# Altium PCB PCB.PcbDoc
Units mm, origin at the board's own origin, x right, y up, seen from the top; angles counter-clockwise.
Board outline 40 x 30 mm, 2 copper layers (Top Layer, Bottom Layer); 29 components, 28 nets, 145 pads, 106 vias.
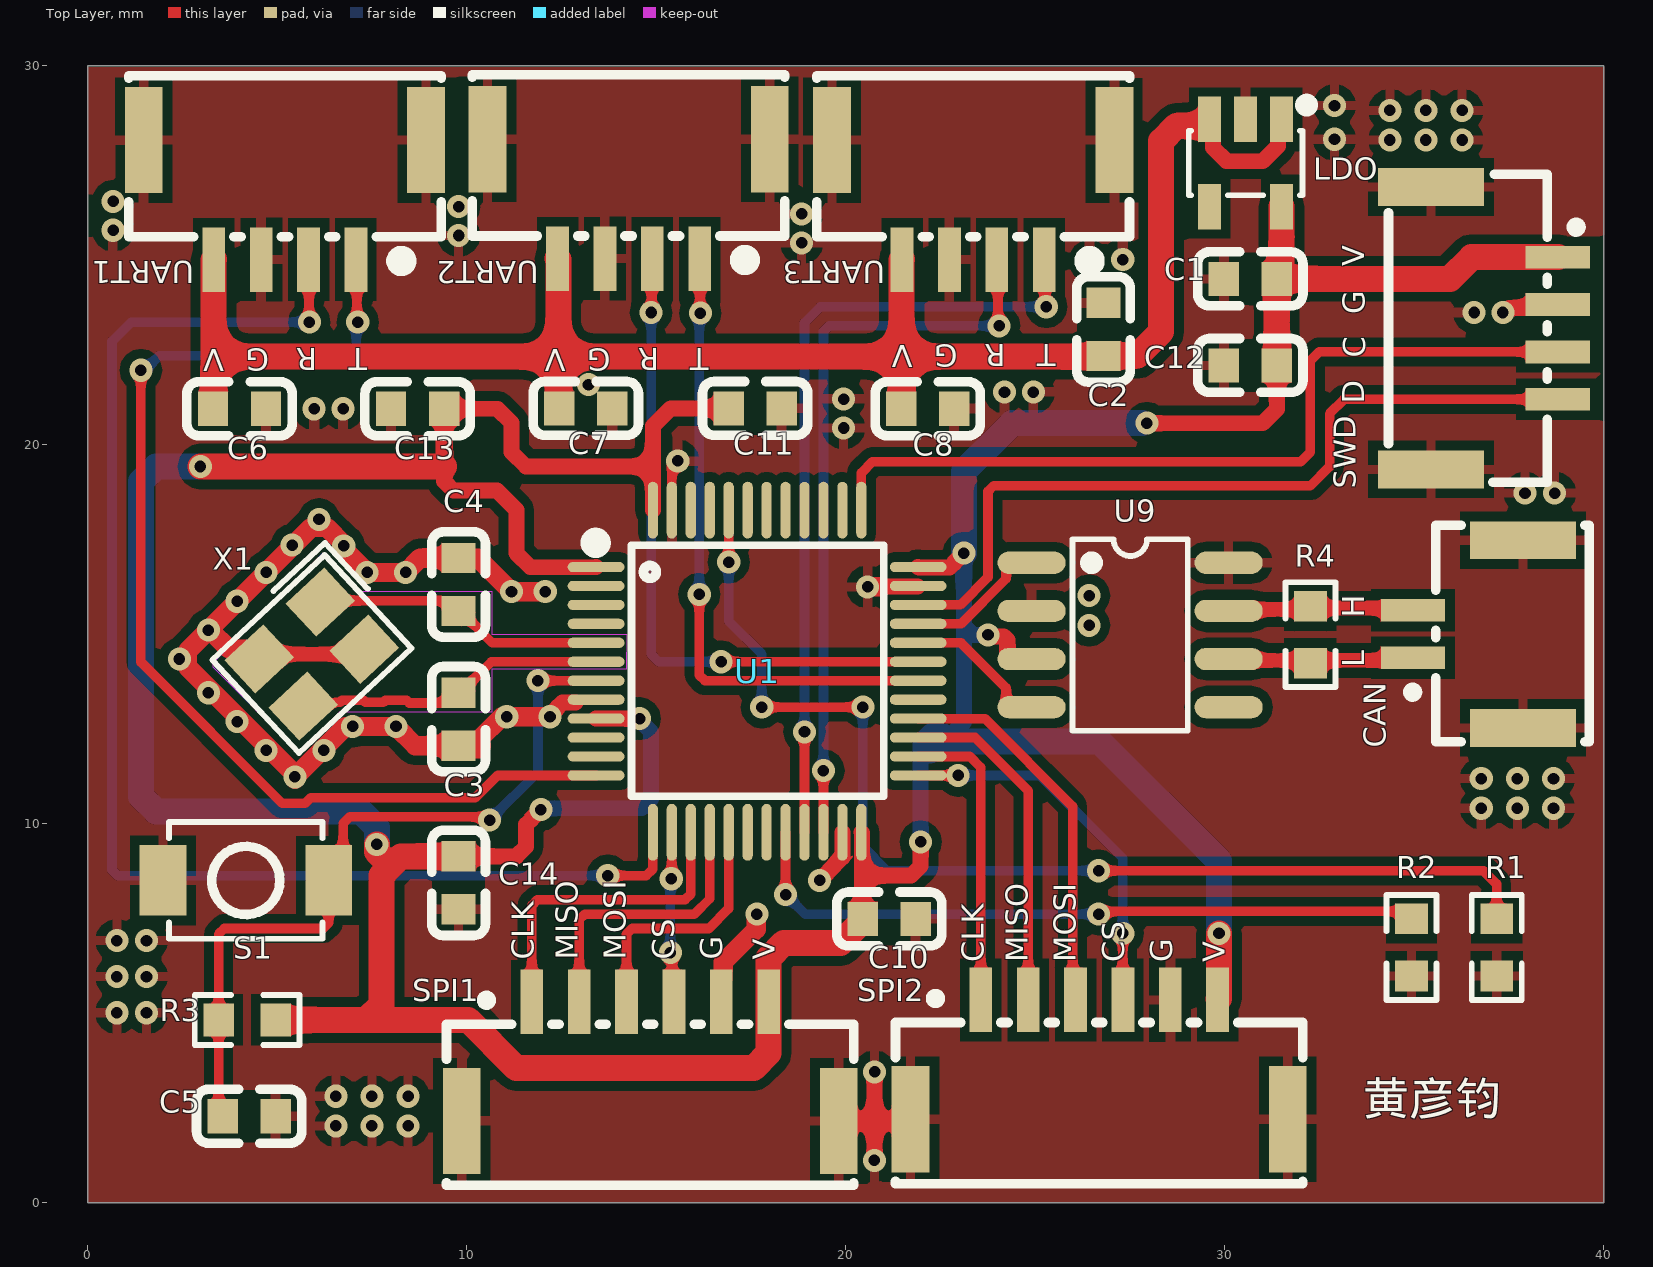
[diagram p0: Top Layer view]
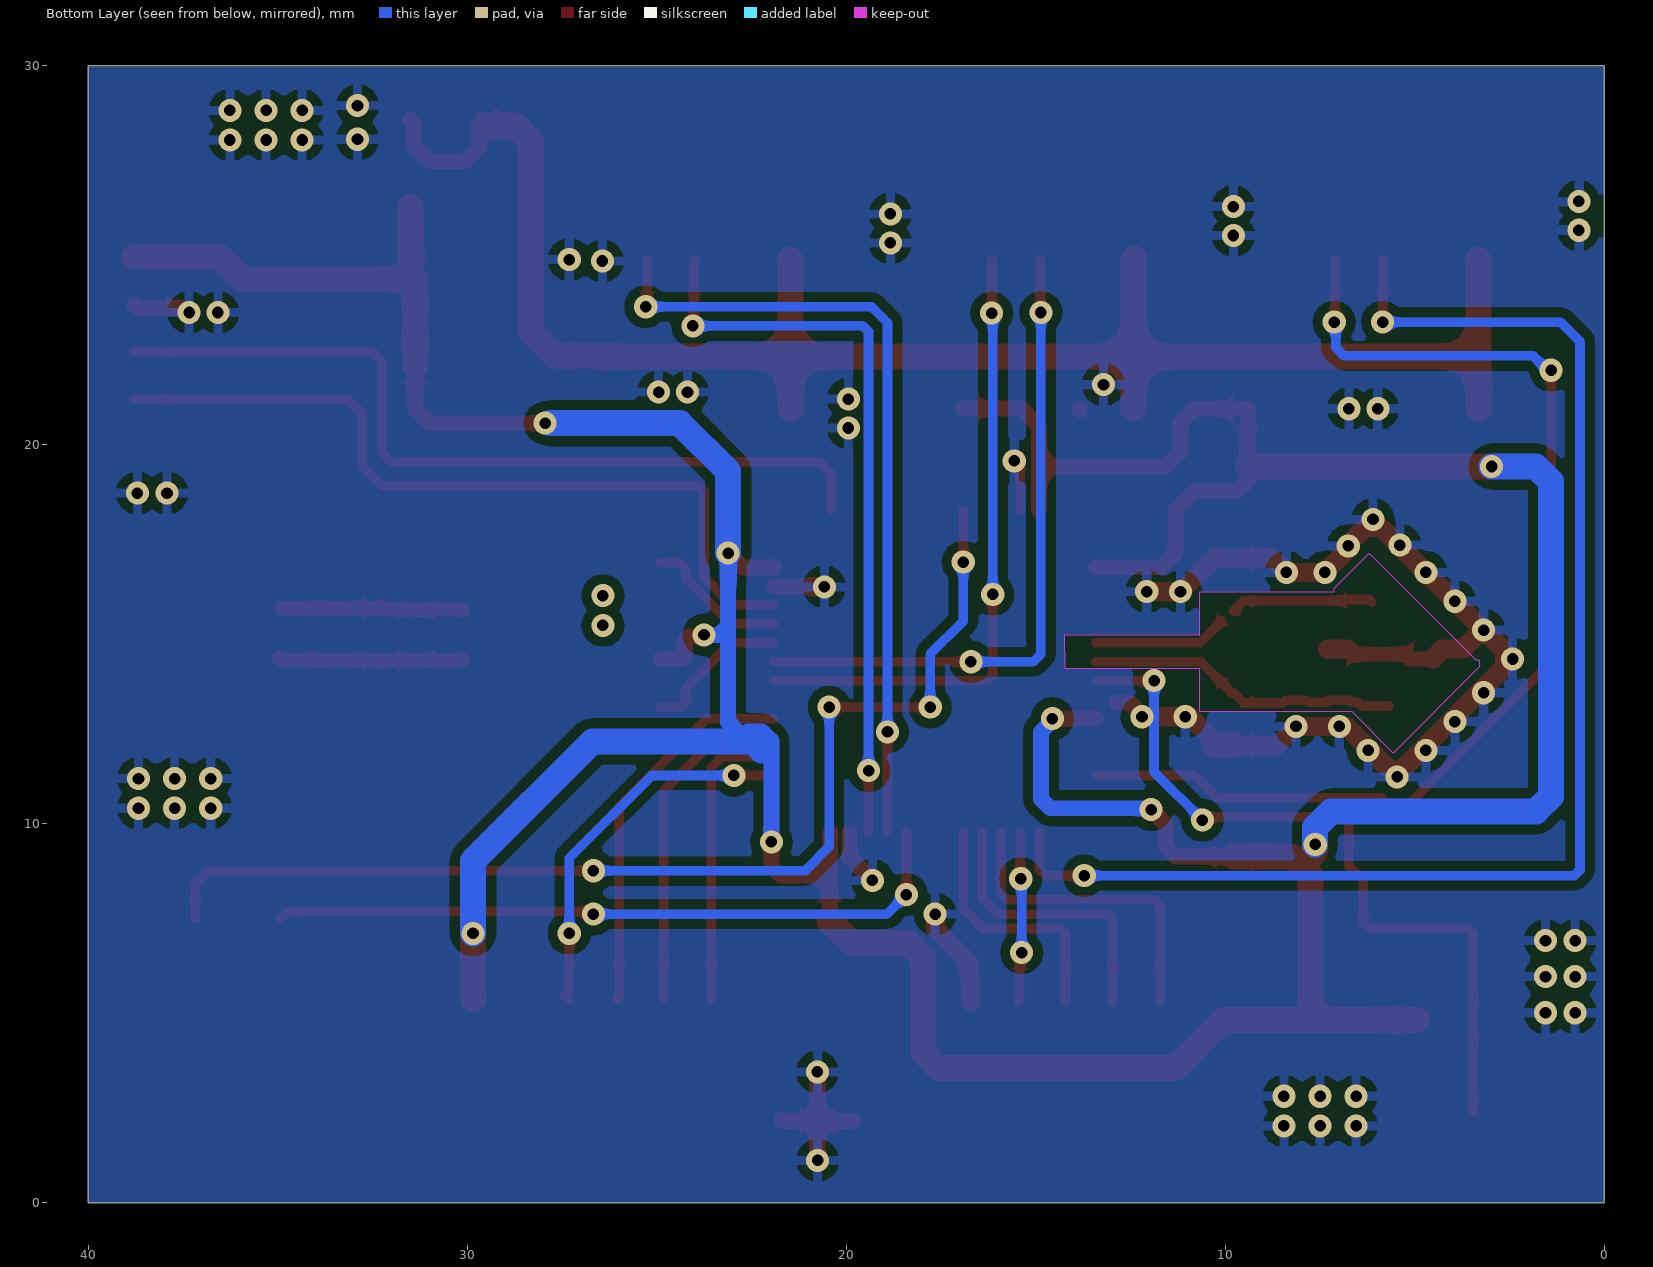
[diagram p1: Bottom Layer view, seen from below]

## Layer stack, top to bottom
Top Solder: solder mask 0.0102, Solder Resist, Dk 3.5
Top Layer: signal copper 0.0356
Dielectric 1: dielectric 0.32, FR-4, Dk 4.8
Bottom Layer: signal copper 0.0356
Bottom Solder: solder mask 0.0102, Solder Resist, Dk 3.5

## Board outline
0,0 40,0 40,30 0,30

## Design rules (kind name [scope] priority, off if disabled: settings)
Clearance [All] p1 off: gap=0.254 ignorepadtopadclearanceinfootprint=TRUE except(0: Arc-Hole Track-Hole SMDPad-Hole THPad-Hole Via-Hole Fill-Hole Poly-Hole Region-Hole Text-Hole)
DiffPairsRouting [All] p1 off: maxlimit=0.254 minlimit=0.254 mostfreqgap=0.254 toplayer_minwidth=0.381 toplayer_maxwidth=0.381 toplayer_prefwidth=0.381 bottomlayer_minwidth=0.381 bottomlayer_maxwidth=0.381 bottomlayer_prefwidth=0.381 maxuncoupledlength=12.7
FanoutControl Fanout_BGA [IsBGA] p1 off: bgadir=Out bgaviamode=Centered fanoutstyle=Auto fanoutdirection=Alternating viagrid=0.025 // Fanout_BGA (Default Rule)
FanoutControl Fanout_LCC [IsLCC] p2 off: bgadir=Out bgaviamode=Centered fanoutstyle=Auto fanoutdirection=Alternating viagrid=0.025 // Fanout_LCC (Default Rule)
FanoutControl Fanout_SOIC [IsSOIC] p3 off: bgadir=Out bgaviamode=Centered fanoutstyle=Auto fanoutdirection=Alternating viagrid=0.025 // Fanout_SOIC (Default Rule)
FanoutControl Fanout_Small [(CompPinCount < 5)] p4 off: bgadir=Out bgaviamode=Centered fanoutstyle=Auto fanoutdirection=OutThenIn viagrid=0.025 // Fanout_Small (Default Rule)
FanoutControl Fanout_Default [All] p5 off: bgadir=Out bgaviamode=Centered fanoutstyle=Auto fanoutdirection=Alternating viagrid=0.025 // Fanout_Default (Default Rule)
PolygonConnect [All] p1: connectstyle=Relief reliefconductorwidth=0.254 reliefentries=4 polygonreliefangle="90 Angle" airgapwidth=0.254
RoutingCorners [All] p1 off: cornerstyle=45-Degree minsetback=2.54 maxsetback=2.54
RoutingLayers [All] p1 off: top layer_v5=TRUE bottom layer_v5=TRUE
RoutingPriority [All] p1 off: routingpriority=0
RoutingTopology [All] p1 off: topology=Shortest
RoutingVias [All] p1 off: holewidth=0.711 width=1.27 viastyle="Through Hole" minholewidth=0.711 minwidth=1.27 maxholewidth=0.711 maxwidth=1.27
ShortCircuit [All] p1 off: allowed=FALSE
SolderMaskExpansion [All] p1: expansion=0.102 istentingtop=FALSE
UnRoutedNet [All] p1 off:
UnpouredPolygon [All] p1 off:
Width [All] p1 off: maxlimit=0.254 minlimit=0.254 preferedwidth=0.254
17 further rules are at their usual default settings.

## Classes and differential pairs
component class Schematic: C1 C2 C3 C5 C6 C7 C8 C10 C11 C12 C13 C14 CAN LDO R1 R2 R3 R4 S1 SWD U9 UART1 UART2 UART3 X1
differential pair NewDifferentialPair4: +RCC_OSC_IN -RCC_OSC_OUT
differential pair NewDifferentialPair3: +CAN_TX -CAN_RX
differential pair NewDifferentialPair2: +CAN_RX -CAN_TX
differential pair NewDifferentialPair1: +CAN_H -CAN_L

## Components (designator, comment, footprint, x,y, rotation, side; value= is the part's Value field where it differs from the comment)
C1 "" CAP_0603 38.934,25.96 r0 top value=1uF
C2 "" CAP_0603 28.373,14.787 r270 top value=1uF
C3 "" CAP_0603 8.203,21.027 r90 top value=20pF
C4 "" CAP_0603 8.203,24.58 r90 top value=20pF
C5 "" CAP_0603 12.515,3.862 r0 top value=100nF
C6 "" CAP_0603 -4.263,19.379 r180 top value=100nF
C7 "" CAP_0603 4.873,19.389 r180 top value=100nF
C8 "" CAP_0603 13.898,19.379 r180 top value=100nF
C10 "" CAP_0603 12.882,5.917 r180 top value=100nF
C11 "" CAP_0603 9.344,19.389 r180 top value=100nF
C12 "" CAP_0603 38.934,23.674 r0 top value=100nF
C13 "" CAP_0603 16.96,22.531 r0 top value=100nF
C14 "" CAP_0603 8.203,16.706 r90 top value=100nF
CAN "WAFER-GH1.25-2PWB" WAFER-GH1.25-2PWB 36.849,15.708 r90 top (schematic designator U10)
LDO "spx3819-3.3" spx3819-3.3 28.834,30.367 r90 top (schematic designator U2)
R1 "" RES_0603 35.675,8.657 r90 top value=10K
R2 "" RES_0603 36.423,4.823 r270 top value=10K
R3 "" RES_0603 6.117,6.324 r0 top value=10K
R4 "" RES_0603 33.756,13.078 r270 top value=120
S1 "SW-PB" SW -0.274,8.78 r180 top
SPI1 "WAFER-GH1.25-6PWB" WAFER-GH1.25-6PWB 14.442,3.002 r0 top (schematic designator U7)
SPI2 "WAFER-GH1.25-6PWB" WAFER-GH1.25-6PWB 26.289,3.048 r0 top (schematic designator U8)
SWD "WAFER-GH1.25-4PLB" WAFER-GH1.25-4PLB 36.449,23.114 r270 top (schematic designator U6)
U1 "STM32F103C8T6" STM32F103C8T6 19.134,5.44 r270 top
U9 "SN65HVD230DR" SN65HVD230DR 29.664,11.289 r270 top
UART1 "WAFER-GH1.25-4PWB" WAFER-GH1.25-4PWB 11.327,25.675 r180 top (schematic designator U3)
UART2 "WAFER-GH1.25-4PWB" WAFER-GH1.25-4PWB 20.396,25.7 r180 top (schematic designator U4)
UART3 "WAFER-GH1.25-4PWB" WAFER-GH1.25-4PWB 29.488,25.675 r180 top (schematic designator U5)
X1 "X32258MSB4SI" X32258MSB4SI 4.545,12.174 r223 top

## Footprints (in the part's own frame and the unit in brackets; to place one, negate y for a bottom-side part, rotate by r counter-clockwise, add the part's x,y. Pads: shape width x height; smd on the part's side, far side on the other; paste and mask are expansions set on the pad)
CAP_0603 [mm]
  rect 0.8x0.9 smd: 1(-8.962,-1.576) 2(-7.562,-1.576)
  silkscreen extent -9.65,-2.29 -6.87,-0.87, body extent -9.4,-2.16 -7.11,-1.02, height 0.25
RES_0603 [mm]
  rect 0.806x0.864 smd paste-100 mask+0.051: 1(-2.67,-1.498) 2(-1.164,-1.498)
  silkscreen extent -3.3,-2.16 -0.53,-0.84, body extent -3.17,-2.16 -0.63,-0.89, height 0.25
SN65HVD230DR [mm]
  oval 0.588x1.8 smd paste+0 mask+0.051: 1(-5.602,-4.765) 2(-4.332,-4.765) 3(-3.062,-4.765) 4(-1.792,-4.765) 5(-1.792,0.435) 6(-3.062,0.435) 7(-4.332,0.435) 8(-5.602,0.435)
  silkscreen extent -6.22,-3.69 -1.17,-0.64, body extent -6.1,-3.68 -1.27,-0.76, height 0.25
spx3819-3.3 [mm]
  rect 1.2x0.6 smd paste+0 mask+0.05: 1(-1.778,-2.662) 2(-1.778,-1.712) 3(-1.778,-0.762) 4(-4.078,-0.762) 5(-4.078,-2.662)
  silkscreen extent -3.78,-3.47 -1.25,-0.21, body extent -3.73,-3.16 -2.13,-0.26, height 0.25
STM32F103C8T6 [mm]
  oval 0.27x1.5 smd paste+0 mask+0.05: 1(-11.339,-5.727) 2(-10.839,-5.727) 3(-10.339,-5.727) 4(-9.839,-5.727) 5(-9.339,-5.727) 6(-8.839,-5.727) 7(-8.339,-5.727) 8(-7.839,-5.727) 9(-7.339,-5.727) 10(-6.839,-5.727) 11(-6.339,-5.727) 12(-5.839,-5.727) 25(-5.839,2.773) 26(-6.339,2.773) 27(-6.839,2.773) 28(-7.339,2.773) 29(-7.839,2.773) 30(-8.339,2.773) 31(-8.839,2.773) 32(-9.339,2.773) 33(-9.839,2.773) 34(-10.339,2.773) 35(-10.839,2.773) 36(-11.339,2.773)
  oval 1.5x0.27 smd paste+0 mask+0.05: 13(-4.339,-4.227) 14(-4.339,-3.727) 15(-4.339,-3.227) 16(-4.339,-2.727) 17(-4.339,-2.227) 18(-4.339,-1.727) 19(-4.339,-1.227) 20(-4.339,-0.727) 21(-4.339,-0.227) 22(-4.339,0.273) 23(-4.339,0.773) 24(-4.339,1.273) 37(-12.839,1.273) 38(-12.839,0.773) 39(-12.839,0.273) 40(-12.839,-0.227) 41(-12.839,-0.727) 42(-12.839,-1.227) 43(-12.839,-1.727) 44(-12.839,-2.227) 45(-12.839,-2.727) 46(-12.839,-3.227) 47(-12.839,-3.727) 48(-12.839,-4.227)
  silkscreen extent -12.18,-5.94 -5.29,1.86, body extent -11.94,-4.83 -5.33,1.78, height 0.25
SW [mm]
  rect 1.23x1.86 smd: 1(-6.624,0.271) 2(-2.254,0.271)
  silkscreen extent -6.47,-1.27 -2.41,1.81, body extent -6.35,-1.14 -2.54,1.65, height 0.25
WAFER-GH1.25-2PWB [mm]
  rect 0.6x1.7 smd paste+0 mask+0.05: 1(-1.322,1.884) 2(-0.072,1.884)
  rect 1x2.8 smd paste+0 mask+0.05: 3(-3.172,-1.016) 4(1.778,-1.016)
  silkscreen extent -3.54,-2.76 2.18,2.02, body extent -3.43,-2.76 2.18,1.14, height 0.25
WAFER-GH1.25-4PLB [mm]
  rect 0.6x1.7 smd: 1(-1.841,2.337) 2(-0.591,2.337) 3(0.659,2.337) 4(1.909,2.337)
  rect 1x2.8 smd: 5(-3.691,-1.013) 6(3.759,-1.013)
  silkscreen extent -4.03,-2.13 4.1,2.95, body extent -3.94,-2.03 3.94,1.91, height 0.25
WAFER-GH1.25-4PWB [mm]
  rect 0.6x1.7 smd paste+0 mask+0.05: 1(4.255,0.783) 2(5.505,0.783) 3(6.755,0.783) 4(8.005,0.783)
  rect 1x2.8 smd paste+0 mask+0.05: 5(9.855,-2.367) 6(2.405,-2.367)
  silkscreen extent 2,-4.06 10.25,1.02, body extent 2.16,-3.94 10.17,0, height 0.25
WAFER-GH1.25-6PWB [mm]
  rect 0.6x1.7 smd paste+0 mask+0.05: 1(-2.73,2.307) 2(-1.48,2.307) 3(-0.23,2.307) 4(1.02,2.307) 5(2.27,2.307) 6(3.52,2.307)
  rect 1x2.8 smd paste+0 mask+0.05: 7(5.37,-0.843) 8(-4.58,-0.843)
  silkscreen extent -4.98,-2.54 5.77,2.47, body extent -4.83,-2.41 5.75,1.52, height 0.25
X32258MSB4SI [mm]
  rect 1.4x1.2 smd: 1(-3.669,-1.61) 2(-1.469,-1.61) 3(-1.469,0.09) 4(-3.669,0.09)
  silkscreen extent -4.83,-2.67 -0.54,0.92, body extent -4.45,-2.29 -0.63,0.76, height 0.25

## Part data
C1 C2 C3 C4 C5 C6 C7 C8 C10 C11 C12 C13 C14: library part Cap, "Capacitor", LatestRevisionDate=17-Jul-2002, LatestRevisionNote="Re-released for DXP Platform.", PackageDescription="Radial Cap, Thru-Hole; 2 Leads; 0.3 in Pin Spacing", PackageReference=RAD-0.3, Published=8-Jun-2000, Publisher="Altium Limited"
R1 R2 R3 R4: library part Res2, "Resistor", LatestRevisionDate=17-Jul-2002, LatestRevisionNote="Re-released for DXP Platform.", PackageDescription="Axial Device, Thru-Hole; 2 Leads; 0.4 in Pin Spacing", PackageReference=AXIAL-0.4, Published=8-Jun-2000, Publisher="Altium Limited"
S1: "Switch", LatestRevisionDate=17-Jul-2002, LatestRevisionNote="Re-released for DXP Platform.", PackageDescription="Switch; 2 Leads", PackageReference=SPST-2, Published=24-Mar-1999, Publisher="Altium Limited"

## Via types
v1: diameter 0.61, hole 0.305, Top Layer to Bottom Layer, 106 vias

## Nets (pads, with @x,y where several pads share a name; then routed paths per layer and width w, separated by ;. In a path a pad name is that pad's centre, name@x,y a point inside that pad or via, vN(x,y) a via of type N, cw(c..) or ccw(c..) an arc to the next point about the centre after c; other vN are vias at no path point)
3V3: C1.2 C10.2 C11.2 C12.2 C13.2 C14.2 LDO.5 R3.2 SPI1.6 SPI2.6 SWD.1 U1.1 U1.9 U1.24 U1.36 U1.48 U9.3 | length 130.5
  Top Layer w0.419: C14.2 11.303,9.144 11.557,9.398 11.557,9.981 v1(11.951,10.376) ; U1.9 v1(14.557,12.779) ; U1.1 13.4,16.772 11.676,16.772 11.303,17.145 11.303,18.288 10.795,18.796 9.644,18.796 9.398,19.042 9.398,19.431 C13.2 10.803,20.955 11.176,20.582 11.176,19.812 11.557,19.431 14.907,19.431 ; U1.48 14.907,19.431 ; C11.2 15.377,20.965 14.907,20.495 14.907,19.431 ; U1.24 20.426,9.761 20.426,8.636 ; C10.2 20.426,7.511 20.426,8.636 ; U1.36 21.922,16.764 22.733,16.764 v1(23.114,17.145) ; v1(21.971,9.525) 21.971,8.89 21.717,8.636 20.426,8.636 ; v1(23.749,14.986) 23.785,14.95 24.166,14.95 24.261,14.855 24.261,14.429 24.339,14.351 U9.3 ; v1(27.943,20.574) 31,20.574 31.372,20.947 C12.2 ; SPI2.6 SPI2.6@29.827,5.373
  Top Layer w0.686: v1(2.967,19.431) 9.398,19.431 ; R3.2 7.345,4.826 ; v1(7.62,9.461) 7.62,9.271 8.001,8.89 ; C14.2 8.255,9.144 8.001,8.89 ; C10.2 20.444,7.443 19.859,6.858 18.364,6.858 17.962,6.456 SPI1.6 17.964,5.307 17.964,3.958 17.562,3.556 11.303,3.556 10.033,4.826 7.345,4.826 ; SPI2.6@29.827,5.373 29.845,5.391 v1(29.845,7.112) ; C12.2 31.369,22.101 31.369,24.384 C1.2 35.941,24.384 36.512,24.955 SWD.1 ; C1.2@31.496,24.688 LDO.5 ; 7.345,4.826 7.747,5.228 7.747,8.636 8.001,8.89
  Bottom Layer w0.419: v1(11.951,10.376) 11.99,10.414 14.613,10.414 14.859,10.66 14.859,12.426 14.557,12.728 v1(14.557,12.779) ; v1(21.971,9.525) 21.971,11.938 21.971,12.192 22.225,12.446 22.589,12.446 ; 22.868,12.446 23.114,12.692 23.114,15.232 ; v1(23.114,17.145) 23.114,15.232 ; v1(23.749,14.986) 23.36,14.986 23.114,15.232
  Bottom Layer w0.686: v1(2.967,19.431) 1.799,19.431 1.397,19.029 1.397,10.73 1.799,10.328 7.198,10.328 7.62,9.906 v1(7.62,9.461) ; 22.225,11.938 22.468,12.181 26.689,12.181 29.845,9.025 v1(29.845,7.112) ; v1(23.114,17.145) 23.114,19.304 24.384,20.574 v1@27.813,20.574
+5V: C2.2 C6.2 C7.2 C8.2 LDO.1 LDO.3 UART1.4 UART2.4 UART3.4 | length 47.1
  Top Layer w0.419: LDO.3 29.591,28.584 29.687,28.488 29.687,27.844 30.045,27.486 30.998,27.486 31.406,27.893 31.406,28.499 LDO.1
  Top Layer w0.686: C6.2 3.31,20.966 3.31,22.333 ; UART1.4 3.31,24.881 3.31,22.333 ; UART2.4 12.413,24.895 12.413,22.333 ; C7.2 12.413,20.987 12.413,22.333 ; C8.2 21.471,20.966 21.471,22.333 ; UART3.4 21.471,24.881 21.471,22.333 ; LDO.3@29.553,28.418 28.723,28.418 28.321,28.017 28.321,22.987 27.689,22.355 26.543,22.355 26.521,22.333 21.471,22.333 ; 3.31,22.333 12.413,22.333 ; 12.413,22.333 21.471,22.333
BOOT0: R1.2 U1.44 | length 30
  Top Layer w0.254: v1(16.907,16.907) U1.44 ; v1(17.78,13.081) v1(20.447,13.081) ; v1(26.67,8.763) 36.83,8.763 37.173,8.42 R1.2
  Bottom Layer w0.254: v1(16.907,16.907) 16.891,16.891 16.907,16.875 16.907,15.351 17.78,14.478 v1(17.78,13.081) ; v1(20.447,13.081) 20.447,9.398 21.082,8.763 v1(26.67,8.763)
BOOT1: R2.1 U1.20 | length 18.5
  Top Layer w0.254: v1(18.407,8.136) U1.20 ; v1(26.67,7.62) 26.741,7.691 34.727,7.691 R2.1
  Bottom Layer w0.254: v1(18.407,8.136) 18.923,7.62 v1(26.67,7.62)
CAN_H: CAN.2 R4.1 U9.7 | length 4.8
  Top Layer w0.381: U9.7 30.139,15.661 R4.1@32.258,15.661 ; R4.1 32.314,15.692 CAN.2@34.909,15.692
CAN_L: CAN.1 R4.2 U9.6 | length 5
  Top Layer w0.381: U9.6 30.139,14.311 R4.2@32.328,14.311 ; R4.2 R4.2@32.328,14.311 ; CAN.1 34.893,14.313 32.33,14.313 R4.2@32.328,14.311
CAN_RX: U1.32 U9.4 | length 3.9
  Top Layer w0.254: U1.32 23.038,14.779 24.229,13.588 24.229,13.235 24.383,13.081 U9.4
CAN_TX: U1.33 U9.1 | length 3.8
  Top Layer w0.254: U1.33 23.038,15.279 24.229,16.47 24.229,16.737 24.383,16.891 U9.1
GND: C1.1 C2.1 C3.1 C4.2 C5.2 C6.1 C7.1 C8.1 C10.1 C11.1 C12.1 C13.1 C14.1 CAN.3 CAN.4 LDO.2 R1.1 R2.2 S1.2 SPI1.5 SPI1.7 SPI1.8 SPI2.5 SPI2.7 SPI2.8 SWD.2 SWD.5 SWD.6 U1.8 U1.23 U1.35 U1.47 U9.2 U9.8 UART1.3 UART1.5 UART1.6 UART2.3 UART2.5 UART2.6 UART3.3 UART3.5 UART3.6 X1.2 X1.4 | length 24.3
  Top Layer w0.254: U1.47 15.407,19.33 15.562,19.485 v1(15.562,19.581)
  Top Layer w0.381: X1.2 5.134,14.353 5.259,14.478 6.544,14.478 6.676,14.61 X1.4@6.766,14.61
  Top Layer w0.419: v1(7.366,16.637) v1(8.382,16.637) ; v1(8.128,12.573) 8.18,12.573 8.688,12.065 C3.1 ; C4.2 10.287,17.018 v1(11.176,16.129) ; v1(11.049,12.827) v1(12.192,12.827) 12.192,12.879 12.518,13.204 U1.8@12.867,13.204 ; C7.1@13.835,20.915 C7.1 ; v1(19.304,8.509) 19.907,9.112 U1.23 ; SPI1.7 20.754,2.159 ; v1@20.585,16.267 U1.35@21.896,16.267 ; v1(20.75,1.119) 20.754,1.124 20.754,2.159 ; v1(20.759,3.456) 20.754,3.452 20.754,2.159 ; SPI2.8 21.663,2.159 20.754,2.159 ; v1(37.338,23.495) 37.39,23.495 37.509,23.614 38.696,23.614 SWD.2
  Top Layer w0.508: v1(3.175,15.113) 3.222,15.113 3.72,14.615 4.259,14.615 X1.2 ; X1.4@6.766,14.61 X1.4 ; SPI1.5 16.712,5.859 16.758,5.905 16.758,6.146 16.764,6.152 16.764,6.35 17.634,7.22 17.634,7.601 v1(17.653,7.62) ; v1@20.585,16.267 v1(20.574,16.256) 20.955,16.256
  other v1: 6.54,2.032 7.493,2.032 8.445,2.032 6.54,2.814 7.493,2.814 8.445,2.814 0.762,5.016 1.544,5.016 0.762,5.969 1.544,5.969 0.762,6.921 1.544,6.921 36.767,10.414 37.719,10.414 38.672,10.414 36.767,11.196 37.719,11.196 38.672,11.196 5.461,11.239 4.699,11.938 6.223,11.938 6.985,12.573 3.937,12.7 3.175,13.462 2.413,14.351 3.937,15.875 12.065,16.129 4.699,16.637 5.385,17.359 6.75,17.337 6.096,18.034 37.92,18.73 38.703,18.73 19.939,20.447 5.969,20.955 6.731,20.955 19.939,21.209 24.185,21.394 24.947,21.394 13.208,21.59 36.576,23.495 26.43,24.854 27.305,24.892 18.832,25.333 9.779,25.527 0.662,25.667 18.832,26.095 9.779,26.289 0.662,26.429 34.353,28.047 35.306,28.047 36.258,28.047 32.893,28.067 34.353,28.829 35.306,28.829 36.258,28.829 32.893,28.956
NRST: C5.1 R3.1 S1.1 U1.7 | length 20.2
  Top Layer w0.254: C5.1@3.446,2.396 R3.1 3.446,7.09 3.595,7.239 6.201,7.239 6.35,7.388 S1.1 6.731,8.89 6.731,10.011 6.905,10.185 10.516,10.185 v1(10.6,10.101) ; v1(11.874,13.779) U1.7
  Bottom Layer w0.254: v1(10.6,10.101) 11.874,11.375 v1(11.874,13.779)
RCC_OSC_IN: C4.1 U1.5 X1.1 | length 7.4
  Top Layer w0.254: X1.1 6.198,15.922 6.901,15.922 6.932,15.891 9.506,15.891 C4.1 ; C4.1@9.675,15.615 C4.1@9.725,15.615 ; C4.1@10.083,15.364 10.668,14.779 U1.5
RCC_OSC_OUT: C3.2 U1.6 X1.3 | length 8.3
  Top Layer w0.254: X1.3 6.383,13.11 6.466,13.192 6.516,13.192 6.531,13.208 6.65,13.208 6.701,13.259 7.269,13.259 7.32,13.208 7.793,13.208 7.844,13.259 8.412,13.259 8.479,13.192 9.506,13.192 C3.2 9.829,13.465 10.643,14.279 U1.6
SPI1_CLK: SPI1.1 U1.15 | length 8.5
  Top Layer w0.254: SPI1.1 11.712,7.852 11.861,8.001 15.758,8.001 15.907,8.15 U1.15
SPI1_CS: SPI1.4 U1.14 | length 4.6
  Top Layer w0.254: v1(15.367,6.604) 15.414,6.557 15.414,5.357 SPI1.4 ; v1(15.39,8.553) 15.404,8.567 15.404,9.776 U1.14
  Bottom Layer w0.254: v1(15.367,6.604) 15.367,8.53 v1(15.39,8.553) v1@15.458,8.485
SPI1_MISO: SPI1.2 U1.16 | length 7.6
  Top Layer w0.254: SPI1.2 12.962,7.471 13.111,7.62 16.002,7.62 16.407,8.025 U1.16@16.407,9.779
SPI1_MOSI: SPI1.3 U1.17 | length 6.8
  Top Layer w0.254: SPI1.3 14.212,7.09 14.361,7.239 16.383,7.239 16.907,7.763 U1.17
SPI2_CLK: SPI2.1 U1.26 | length 7.9
  Top Layer w0.254: U1.26 23.273,11.779 23.559,11.493 SPI2.1
SPI2_CS: SPI2.4 U1.25 | length 10.1
  Top Layer w0.254: U1.25 v1(22.963,11.279) ; v1(27.305,7.112) 27.305,5.605 27.432,5.478 SPI2.4
  Bottom Layer w0.254: v1(22.963,11.279) 25.124,11.279 27.305,9.098 v1(27.305,7.112)
SPI2_MISO: SPI2.2 U1.27 | length 9
  Top Layer w0.254: U1.27 23.408,12.279 24.809,10.878 SPI2.2
SPI2_MOSI: SPI2.3 U1.28 | length 10.2
  Top Layer w0.254: U1.28 23.67,12.779 25.984,10.465 25.984,5.43 SPI2.3
SWCLK: SWD.3 U1.37 | length 22.1
  Top Layer w0.254: U1.37 20.407,19.264 20.701,19.558 32.004,19.558 32.258,19.812 32.258,22.225 32.488,22.455 SWD.3
SWDIO: SWD.4 U1.34 | length 21.3
  Top Layer w0.254: U1.34 23.018,15.779 23.749,16.51 23.749,18.774 23.898,18.923 32.258,18.923 32.766,19.431 32.766,20.828 33.143,21.205 SWD.4
UART1_RX: U1.31 UART2.2 | length 17.6
  Top Layer w0.254: v1(14.859,23.495) 14.875,23.511 14.875,24.901 UART2.2 ; v1(16.709,14.279) U1.31
  Bottom Layer w0.254: v1(14.859,23.495) 14.859,14.478 15.058,14.279 16.599,14.279 16.654,14.224 v1(16.709,14.279)
UART1_TX: U1.30 UART2.1 | length 16.9
  Top Layer w0.254: v1@16.07,16.115 v1(16.129,16.056) 16.129,13.928 16.278,13.779 U1.30 ; UART2.1 16.15,24.908 16.15,23.489 v1(16.159,23.481)
  Bottom Layer w0.254: v1(16.129,16.056) 16.129,23.451 v1(16.159,23.481)
UART2_RX: U1.13 UART1.2 | length 36.4
  Top Layer w0.254: UART1.2 5.832,24.882 5.832,23.251 v1(5.842,23.241) ; v1(13.716,8.636) 14.732,8.636 14.904,8.808 14.904,9.776 U1.13
  Bottom Layer w0.254: v1(5.842,23.241) 1.143,23.241 0.635,22.733 0.635,8.785 0.784,8.636 v1(13.716,8.636)
UART2_TX: U1.12 UART1.1 | length 29.8
  Top Layer w0.254: v1(1.397,21.971) 1.397,14.27 5.126,10.541 5.732,10.541 5.885,10.693 10.222,10.693 10.808,11.279 U1.12 ; UART1.1 7.096,24.868 7.096,23.264 v1(7.119,23.241)
  Bottom Layer w0.254: v1(1.397,21.971) 1.493,21.971 1.874,22.352 6.858,22.352 7.075,22.569 7.075,23.196 v1(7.119,23.241)
UART3_RX: U1.22 UART3.2 | length 19.7
  Top Layer w0.254: U1.22 v1(19.407,11.406) ; UART3.2 24.013,24.862 24.013,23.171 v1(24.043,23.141)
  Bottom Layer w0.254: v1(19.407,11.406) 19.407,22.993 19.556,23.141 v1(24.043,23.141)
UART3_TX: U1.21 UART3.1 | length 21.3
  Top Layer w0.254: U1.21 v1(18.907,12.43) ; UART3.1 25.23,24.89 25.249,24.871 25.249,23.686 v1(25.288,23.647)
  Bottom Layer w0.254: v1(18.907,12.43) 18.907,23.225 19.329,23.647 v1(25.288,23.647)
pads on no net: LDO.4 U1.2 U1.3 U1.4 U1.10 U1.11 U1.18 U1.19 U1.29 U1.38 U1.39 U1.40 U1.41 U1.42 U1.43 U1.45 U1.46 U9.5
copper on no net: | length 24.3
  Top Layer w0.508: 5.461,11.176 5.461,11.303 2.623,14.141 2.623,14.561 5.886,17.824 6.306,17.824 6.75,17.38 6.75,17.253 7.366,16.637 8.382,16.637 8.763,17.018 9.779,17.018 10.287,17.018 11.176,16.129 12.065,16.129 ; 5.461,11.239 6.794,12.573 8.128,12.573 8.636,12.065 9.779,12.065 ; 10.287,12.065 10.287,12.192 10.922,12.827 12.192,12.827
  Top Layer w0.686: 9.779,12.065 10.287,12.065
  other v1: 26.416,15.24 26.416,16.022

## Polygon pours and split planes (outlines as drawn)
GND on Bottom Layer "GND_L02_P006" (solid, pour order 6): 0,29.972 40.005,29.972 40.005,0 0,0
GND on Top Layer "GND_L01_P005" (solid, pour order 5): 0,29.972 40.005,29.972 40.005,0 0,0

## Keep-outs
Keep-Out Layer:
  pour cut-out: 14.224,14.986 10.668,14.986 10.668,16.129 7.112,16.129 7.112,16.225 6.194,17.143 3.382,14.331 3.287,14.331 3.287,14.15 5.567,11.871 6.65,12.954 10.668,12.954 10.668,14.097 14.221,14.097

## Silkscreen, mask and mechanical layers (free items; w line width, h text height)
Top Overlay:
  text "V" at 33.881,24.715 h1 r90
  text "G" at 33.885,23.445 h1 r90
  text "R" at 24.223,22.85 h1 r180
  text "T" at 25.536,22.86 h1 r180
  text "V" at 21.76,22.835 h1 r180
  text "G" at 22.953,22.839 h1 r180
  text "T" at 7.366,22.754 h1 r180
  text "T" at 16.383,22.754 h1 r180
  text "V" at 3.59,22.729 h1 r180
  text "G" at 4.783,22.733 h1 r180
  text "R" at 6.053,22.745 h1 r180
  text "V" at 12.607,22.729 h1 r180
  text "G" at 13.8,22.733 h1 r180
  text "R" at 15.07,22.745 h1 r180
  text "C" at 33.901,22.302 h1 r90
  text "D" at 33.874,21.082 h1 r90
  text "H" at 33.88,15.444 h1 r90
  text "L" at 33.876,14.131 h1 r90
  text "CLK" at 11.965,6.416 h1 r90
  text "MISO" at 13.117,6.416 h1 r90
  text "MOSI" at 14.387,6.416 h1 r90
  text "CS" at 15.666,6.416 h1 r90
  text "G" at 16.931,6.416 h1 r90
  text "V" at 18.325,6.416 h1 r90
  text "CLK" at 23.838,6.35 h1 r90
  text "MISO" at 24.991,6.35 h1 r90
  text "MOSI" at 26.261,6.35 h1 r90
  text "CS" at 27.539,6.35 h1 r90
  text "G" at 28.805,6.35 h1 r90
  text "V" at 30.198,6.35 h1 r90
  text "黄彦钧" at 33.655,2.035 h1.52
Mechanical 1:
  the board outline again, w0.254